# Altium PCB pilar_2.PcbDoc
Units mm, origin at the board's own origin, x right, y up, seen from the top; angles counter-clockwise.
Board outline 44.51 x 66 mm, 2 copper layers (Top Layer, Bottom Layer); 5 components, 2 nets, 14 pads, 0 vias.
Unrouted connection lines stored in the file: 2.
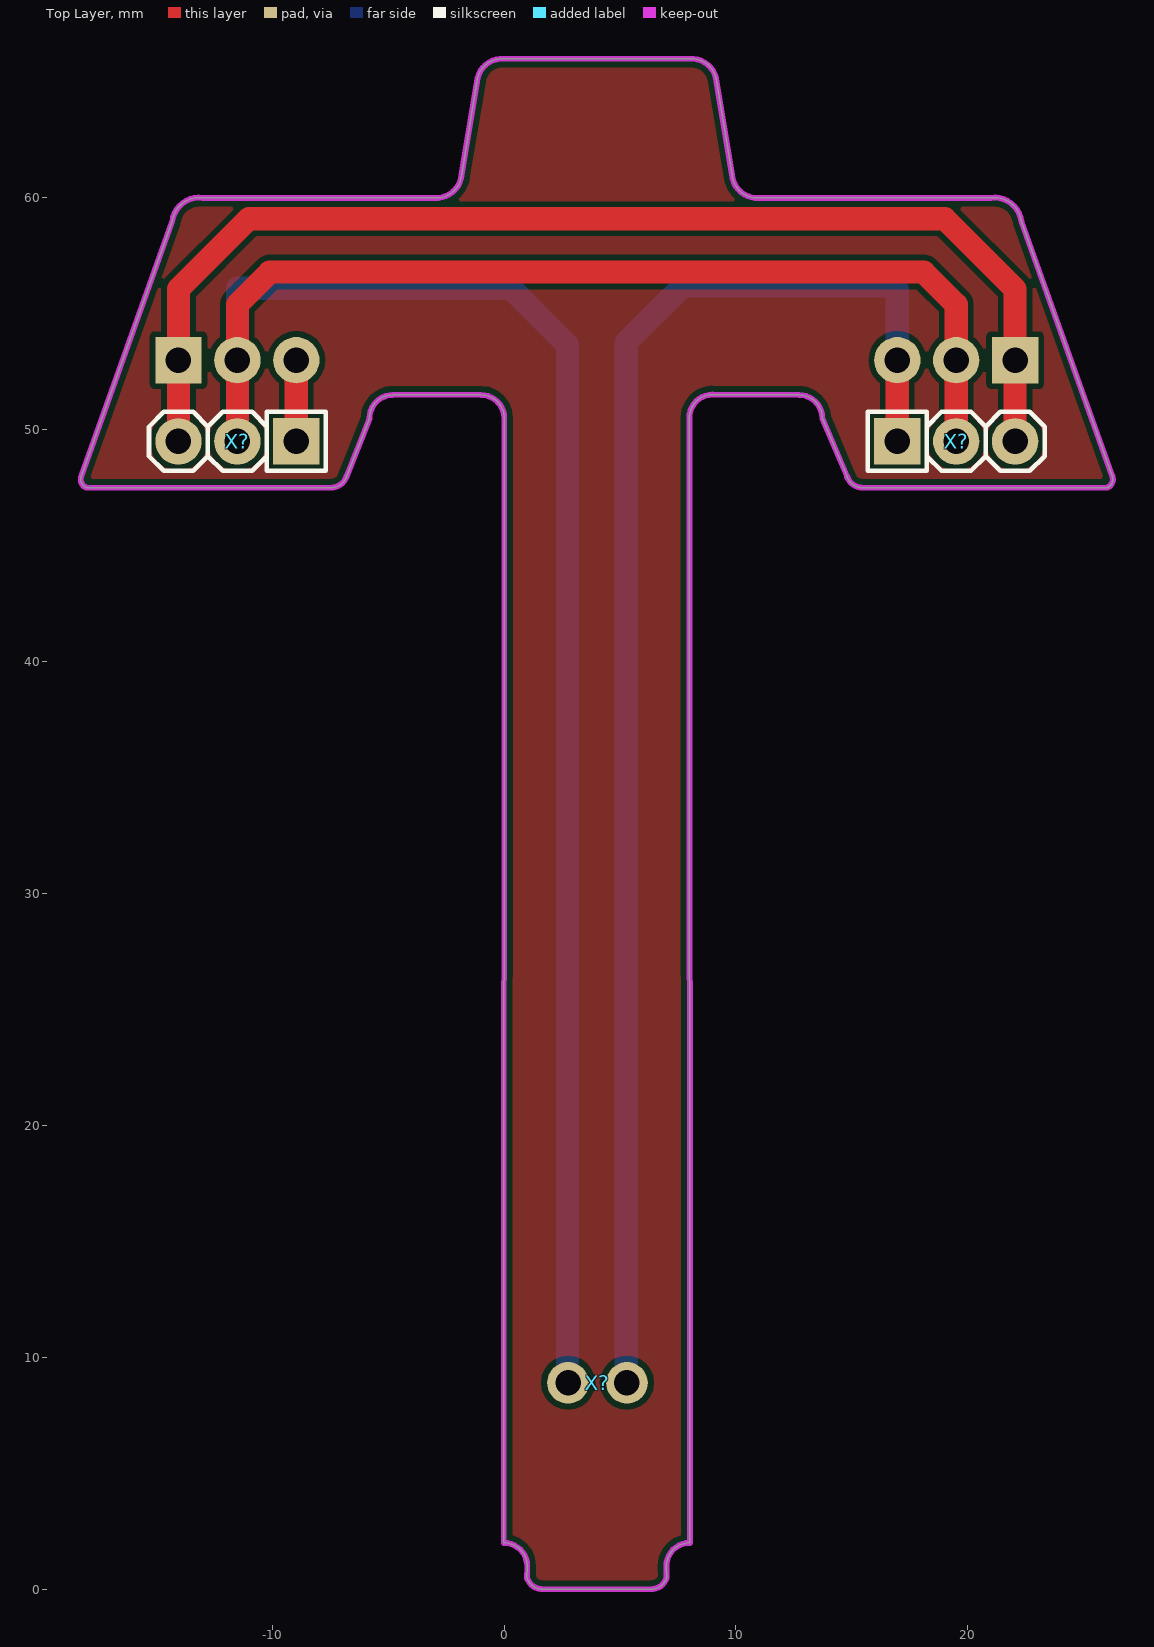
[diagram p0: Top Layer view]
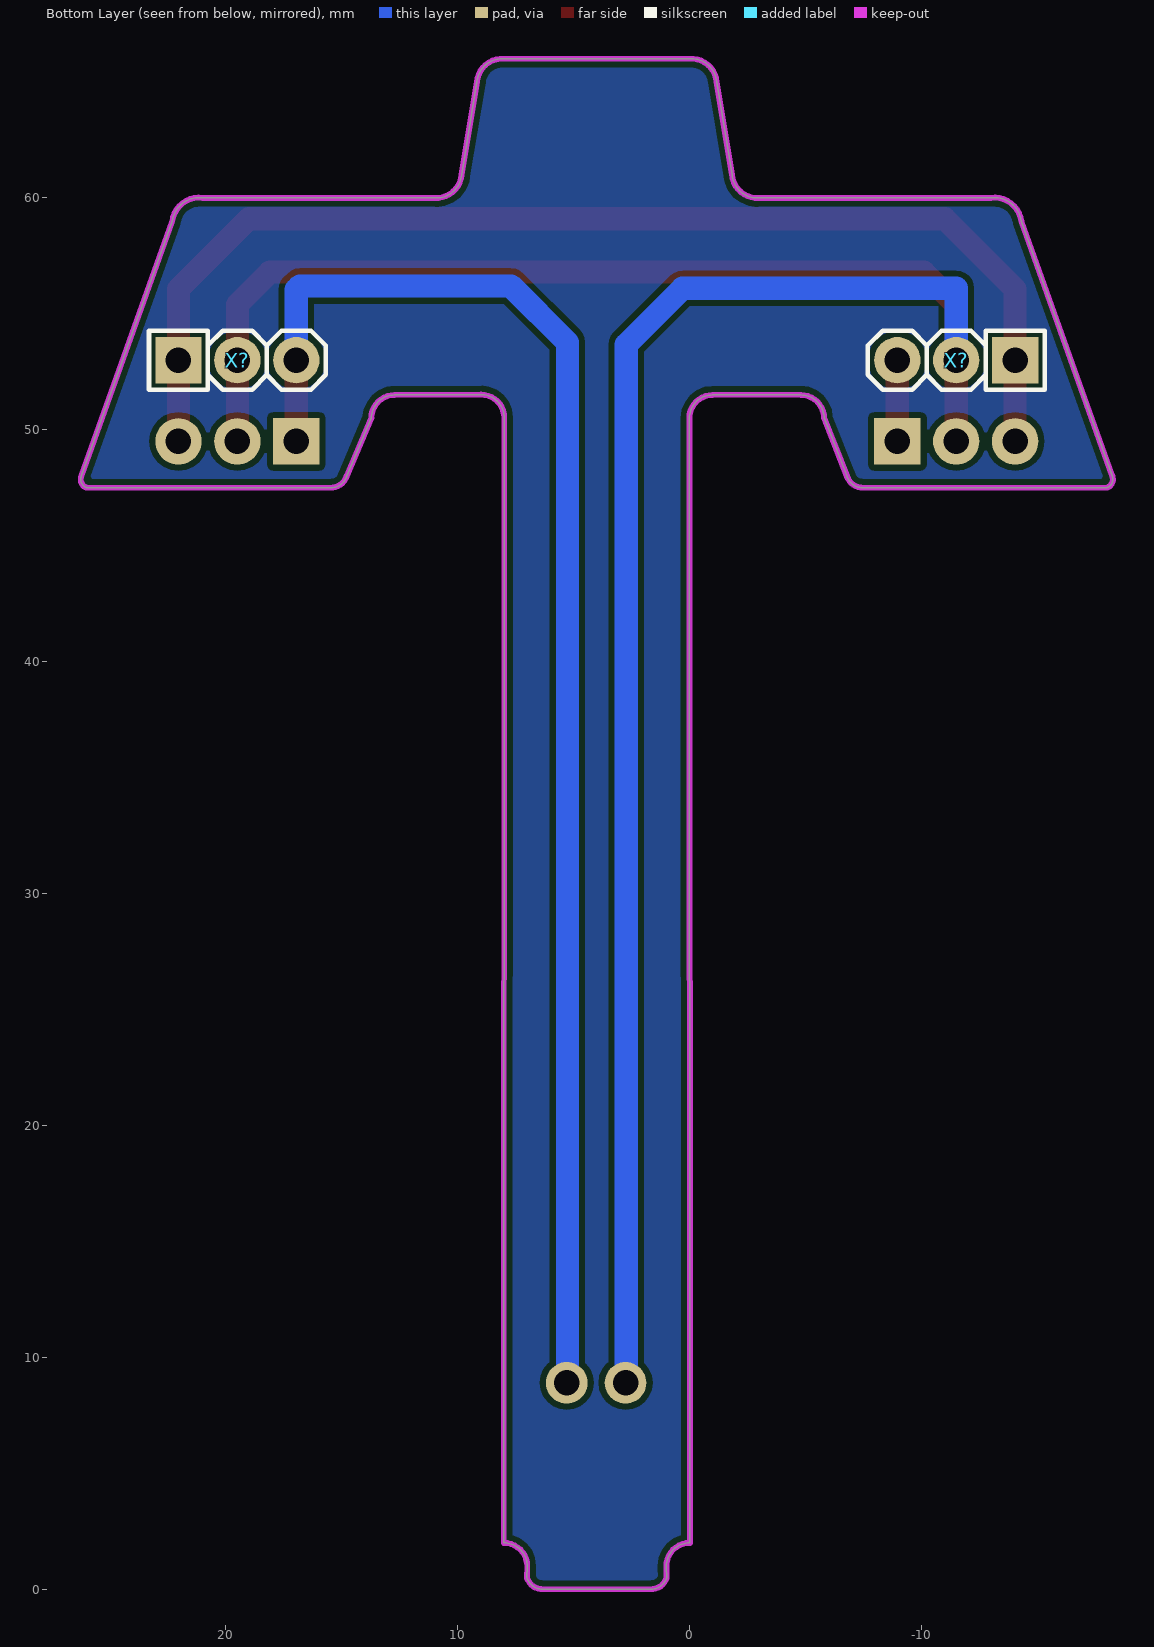
[diagram p1: Bottom Layer view, seen from below]
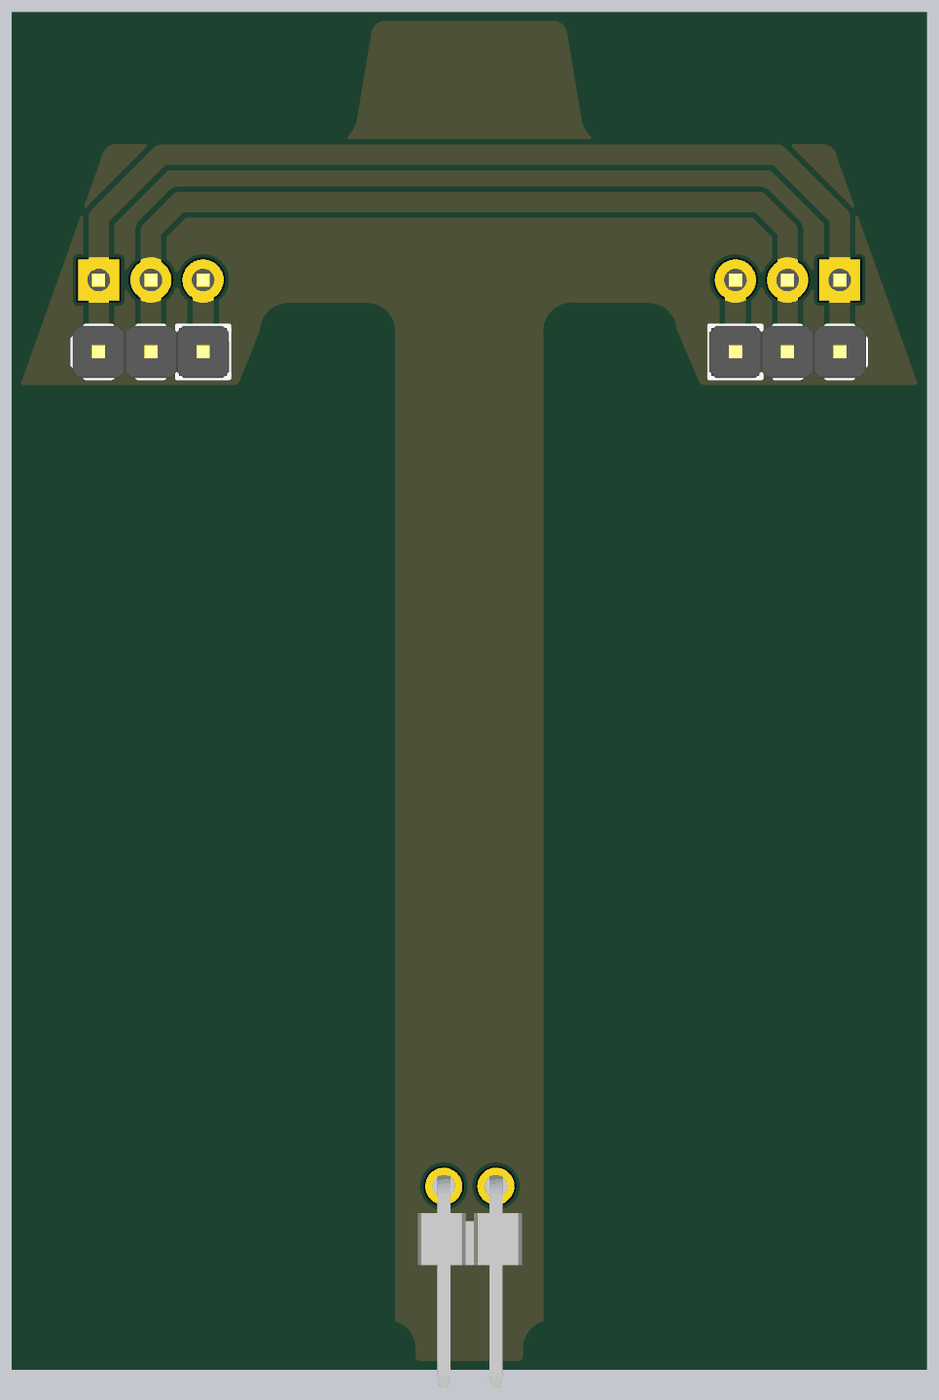
[diagram p2: 3D render of the assembled board from above, using the file's embedded part models]

## Layer stack, top to bottom
Top Solder: solder mask 0.0102, Solder Resist, Dk 3.5
Top Layer: signal copper 0.0356
Dielectric 1: dielectric 0.32, FR-4, Dk 4.8
Bottom Layer: signal copper 0.0356
Bottom Solder: solder mask 0.0102, Solder Resist, Dk 3.5

## Board outline
-18,47.5 cw(c-17.865,47.865) -18.23,48 -14.307,59 cw(c-13.153,58.847) -13,60 -3,60 ccw(c-2.917,61.083) -1.833,61 -1.167,65 cw(c-0.083,64.917) 0,66 8,66 cw(c8.083,64.917) 9.167,65 9.833,61 ccw(c10.917,61.083) 11,60 21,60 cw(c21.153,58.847) 22.307,59 26.23,48 cw(c25.865,47.865) 26,47.5 15.5,47.5 cw(c15.463,48.203) 14.789,48 13.724,50.5 ccw(c12.724,50.5) 12.724,51.5 8.991,51.508 8.991,51.517 ccw(c8.991,50.517) 7.991,50.517 7.989,50.517 8.011,2 8,2 ccw(c8,1) 7,1 7.011,0.5 cw(c6.337,0.703) 6.3,0 1.7,0 cw(c1.663,0.703) 0.989,0.5 1,0.979 1,1 ccw(c0,1) 0,2 -0.011,2 0.011,50.5 ccw(c-0.989,50.5) -0.989,51.5 -0.99,51.508 -4.802,51.5 ccw(c-4.802,50.5) -5.802,50.5 -5.8,50.5 -6.789,48 cw(c-7.463,48.203) -7.5,47.5

## Design rules (kind name [scope] priority, off if disabled: settings)
Clearance [All] p1: gap=0.254 ignorepadtopadclearanceinfootprint=FALSE except(0: Arc-Hole Track-Hole SMDPad-Hole THPad-Hole Via-Hole Fill-Hole Poly-Hole Region-Hole Text-Hole)
PolygonConnect [All] p1: connectstyle=Relief reliefconductorwidth=0.254 reliefentries=4 polygonreliefangle="90 Angle" airgapwidth=0.254
RoutingVias [All] p1: holewidth=0.711 width=1.27 viastyle="Through Hole" minholewidth=0.711 minwidth=1.27 maxholewidth=0.711 maxwidth=1.27
SolderMaskExpansion [All] p1: expansion=0.102
Width [All] p1: maxlimit=10 minlimit=0.254 preferedwidth=0.254 minimp=50.000000 maximp=50.000000 favimp=50.000000
30 further rules are at their usual default settings.

## Classes and differential pairs
component class pilar_2: X?

## Components (designator, comment, footprint, x,y, rotation, side; value= is the part's Value field where it differs from the comment)
X? "Connector, 3pin, 2.54mm, 500VAC, 3A" "CON: PLS-3" 19.5,49.5 r0 top
X? "Connector, 3pin, 2.54mm, 500VAC, 3A" "CON: PLS-3" -11.5,53 r0 bottom
X? "Connector, 3pin, 2.54mm, 500VAC, 3A" "CON: PLS-3" 19.5,53 r180 bottom
X? "Connector, 3pin, 2.54mm, 500VAC, 3A" "CON: PLS-3" -11.5,49.5 r180 top
X? "Connector, 2pin, 2.54mm, 500VAC, 3A" "2PLS right angle" 4.03,8.9 r180 top

## Footprints (in the part's own frame and the unit in brackets; to place one, negate y for a bottom-side part, rotate by r counter-clockwise, add the part's x,y. Pads: shape width x height; smd on the part's side, far side on the other; paste and mask are expansions set on the pad)
"2PLS right angle" [mm]
  round 1.8 hole 1.1: 1(-1.27,0) 2(1.27,0)
  body extent -2.54,-0.52 2.54,9.84, height 2.57
"CON: PLS-3" [mm]
  rect 2x2 hole 1.1: 1(-2.54,0)
  round 2 hole 1.1: 2(0,0) 3(2.54,0)
  silkscreen extent -3.81,-1.27 3.81,1.27, body extent -3.81,-1.27 3.81,1.27, height 8.54

## Part data
X? X? X? X?: library part PLS-3, CurrentMax=3A, Manufacturer=Connfly, VoltageMax=500VAC, CommentText="\"Разъем\"", HelpURL=https://www.chipdip.ru/product/pls-3, Multichannel=3pin, PartNumber=PLS-3, Pitch=2.54mm, TypeConnector=Connector, ValueManufacturerPartNumber="Connector, 3pin, 2.54mm, 500VAC, 3A"
X?: library part PLS-2, CurrentMax=3A, Manufacturer=Connfly, VoltageMax=500VAC, CommentText="\"Разъем\"", HelpURL=https://www.chipdip.ru/product/pls-2, Multichannel=2pin, PartNumber=PLS-2, Pitch=2.54mm, TypeConnector=Connector, ValueManufacturerPartNumber="Connector, 2pin, 2.54mm, 500VAC, 3A"

## Nets (pads, with @x,y where several pads share a name; then routed paths per layer and width w, separated by ;. In a path a pad name is that pad's centre, name@x,y a point inside that pad or via, vN(x,y) a via of type N, cw(c..) or ccw(c..) an arc to the next point about the centre after c; other vN are vias at no path point)
GND: X?.1 X?.3 | length 119.4
  Top Layer w1: X?.3@-14.04,49.5 -14.04,53 -14.04,56.06 -11.001,59.099 19.001,59.099 22.04,56.06 22.04,53 X?.3@22.04,49.5 ; X?.1@-8.96,49.5 X?.3@-8.96,53 ; X?.1@16.96,49.5 X?.3@16.96,53
  Bottom Layer w1: X?.1@5.27,8.9 5.27,53.77 7.7,56.2 16.8,56.2 16.96,56.04 X?.3@16.96,53
VCC: X?.2 | length 107.1
  Top Layer w1: X?.2@-11.5,49.5 -11.5,53 -11.5,55.4 -10.1,56.8 18.1,56.8 19.5,55.4 19.5,53 X?.2@19.5,49.5
  Bottom Layer w1: X?.2@-11.5,53 -11.5,56.1 0.3,56.1 2.73,53.67 X?.2@2.73,8.9

## Polygon pours and split planes (outlines as drawn)
no net on Top Layer "Top Layer-No Net" (solid, pour order 0): -18,47.5 cw(c-17.865,47.865) -18.23,48 -14.307,59 cw(c-13.153,58.847) -13,60 -3,60 ccw(c-2.917,61.083) -1.833,61 -1.167,65 cw(c-0.083,64.917) 0,66 8,66 cw(c8.083,64.917) 9.167,65 9.833,61 ccw(c10.917,61.083) 11,60 21,60 cw(c21.153,58.847) 22.307,59 26.23,48 cw(c25.865,47.865) 26,47.5 15.5,47.5 cw(c15.463,48.203) 14.789,48 13.724,50.5 ccw(c12.724,50.5) 12.724,51.5 8.991,51.508 8.991,51.517 ccw(c8.991,50.517) 7.991,50.517 7.989,50.517 8.011,2 8,2 ccw(c8,1) 7,1 7.011,0.5 cw(c6.337,0.703) 6.3,0 1.7,0 cw(c1.663,0.703) 0.989,0.5 1,0.979 1,1 ccw(c0,1) 0,2 -0.011,2 0.011,50.5 ccw(c-0.989,50.5) -0.989,51.5 -0.99,51.508 -4.802,51.5 ccw(c-4.802,50.5) -5.802,50.5 -5.8,50.5 -6.789,48 cw(c-7.463,48.203) -7.5,47.5
no net on Bottom Layer "Top Layer-No Net1" (solid, pour order 1): -18,47.5 cw(c-17.865,47.865) -18.23,48 -14.307,59 cw(c-13.153,58.847) -13,60 -3,60 ccw(c-2.917,61.083) -1.833,61 -1.167,65 cw(c-0.083,64.917) 0,66 8,66 cw(c8.083,64.917) 9.167,65 9.833,61 ccw(c10.917,61.083) 11,60 21,60 cw(c21.153,58.847) 22.307,59 26.23,48 cw(c25.865,47.865) 26,47.5 15.5,47.5 cw(c15.463,48.203) 14.789,48 13.724,50.5 ccw(c12.724,50.5) 12.724,51.5 8.991,51.508 8.991,51.517 ccw(c8.991,50.517) 7.991,50.517 7.989,50.517 8.011,2 8,2 ccw(c8,1) 7,1 7.011,0.5 cw(c6.337,0.703) 6.3,0 1.7,0 cw(c1.663,0.703) 0.989,0.5 1,0.979 1,1 ccw(c0,1) 0,2 -0.011,2 0.011,50.5 ccw(c-0.989,50.5) -0.989,51.5 -0.99,51.508 -4.802,51.5 ccw(c-4.802,50.5) -5.802,50.5 -5.8,50.5 -6.789,48 cw(c-7.463,48.203) -7.5,47.5

## Keep-outs
Keep-Out Layer:
  lines w0.254: -5.802,50.5 cw(c-4.802,50.5) -4.802,51.5 -0.99,51.508 ; -5.8,50.5 -6.789,48 cw(c-7.463,48.203) -7.5,47.5 -18,47.5 cw(c-17.865,47.865) -18.23,48 -14.307,59 cw(c-13.153,58.847) -13,60 -3,60 ccw(c-2.917,61.083) -1.833,61 -1.167,65 cw(c-0.083,64.917) 0,66 8,66 cw(c8.083,64.917) 9.167,65 9.833,61 ccw(c10.917,61.083) 11,60 21,60 cw(c21.153,58.847) 22.307,59 26.23,48 cw(c25.865,47.865) 26,47.5 15.5,47.5 cw(c15.463,48.203) 14.789,48 13.724,50.5 ccw(c12.724,50.5) 12.724,51.5 8.991,51.508 ; -0.989,51.5 cw(c-0.989,50.5) 0.011,50.5 -0.011,2 ; 0,2 cw(c0,1) 1,1 ; 1,0.979 0.989,0.5 ccw(c1.663,0.703) 1.7,0 6.3,0 ccw(c6.337,0.703) 7.011,0.5 7,1 cw(c8,1) 8,2 ; 7.989,50.517 8.011,2 ; 7.991,50.517 cw(c8.991,50.517) 8.991,51.517